# Altium PCB HAB-Communications-Board.PcbDoc (part 1 of 2)
Units mil, origin at the board's own origin, x right, y up, seen from the top; angles counter-clockwise.
Board outline 3937.01 x 3937.01 mil, 4 copper layers (Top Layer, Layer 1, Layer 2, Bottom Layer), stack 60.708 mil thick; 68 components, 59 nets, 326 pads, 208 vias.
Unrouted connection lines stored in the file: 48.
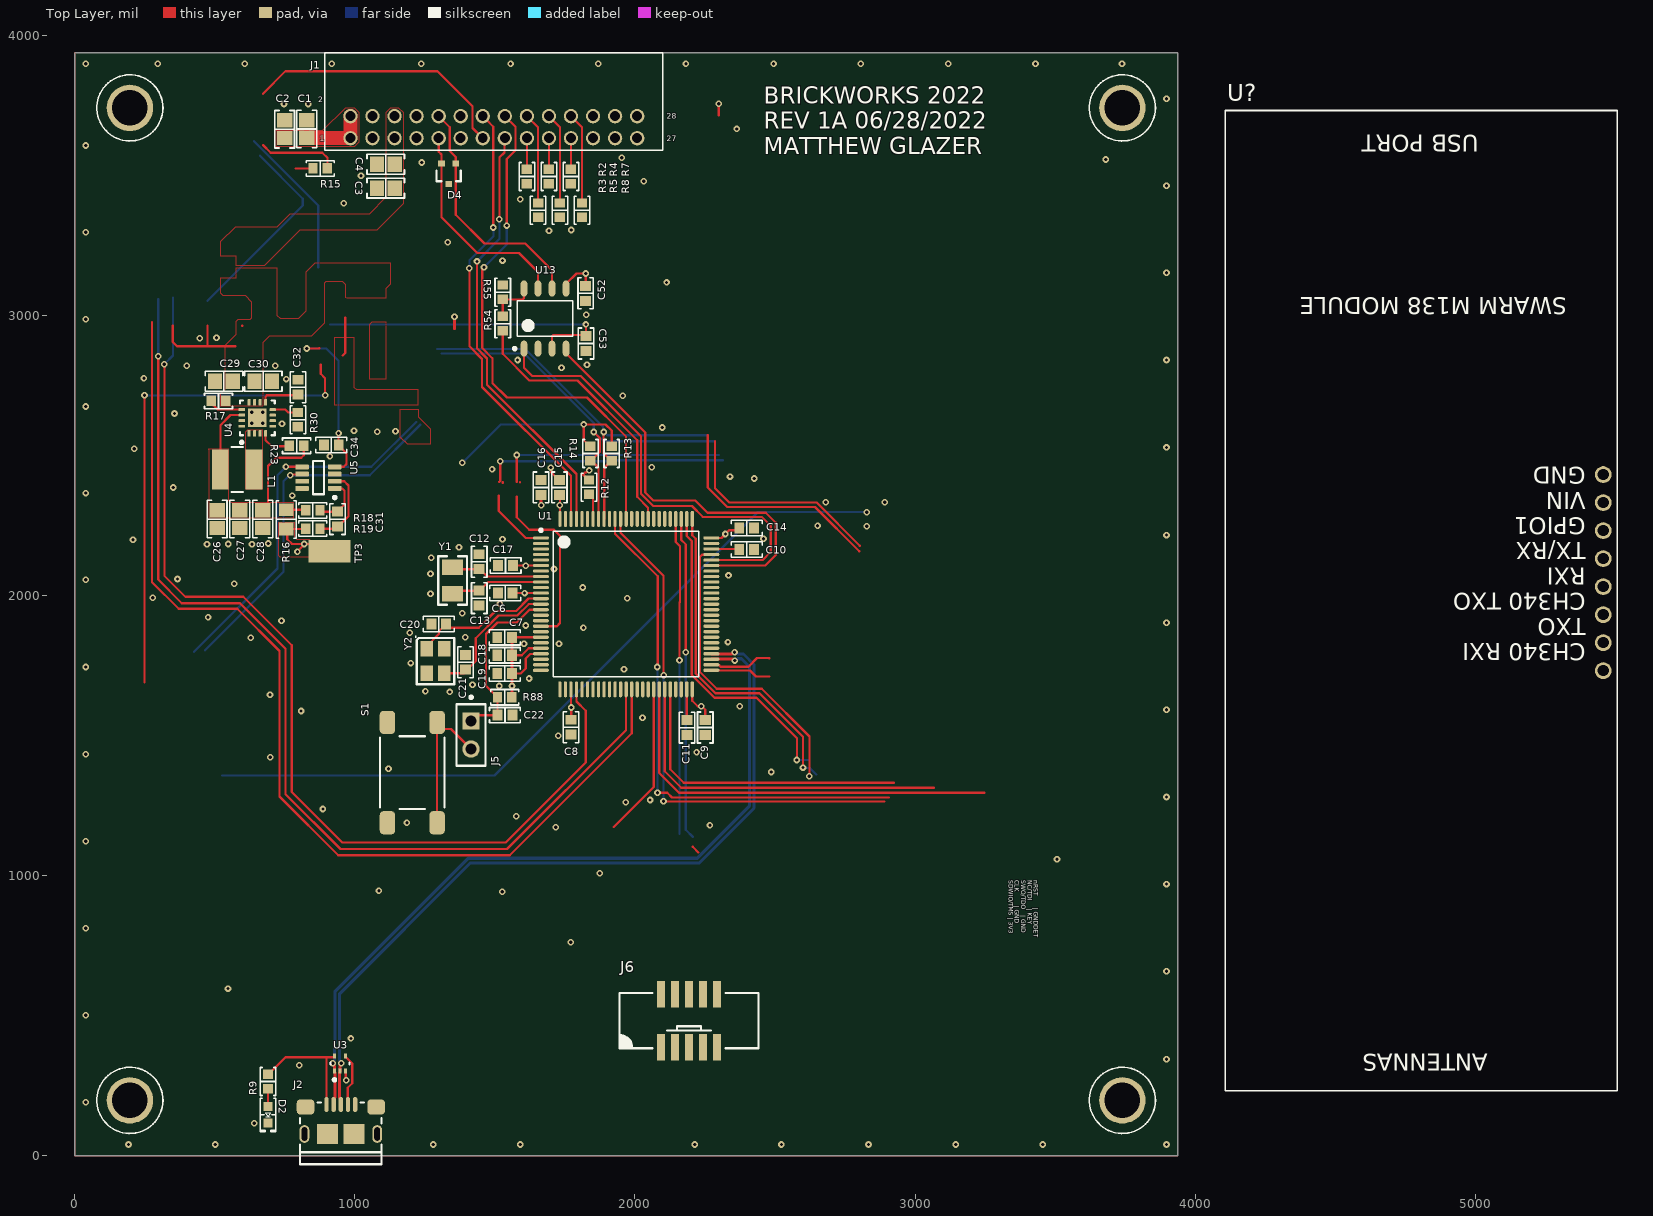
[diagram p0: Top Layer view]
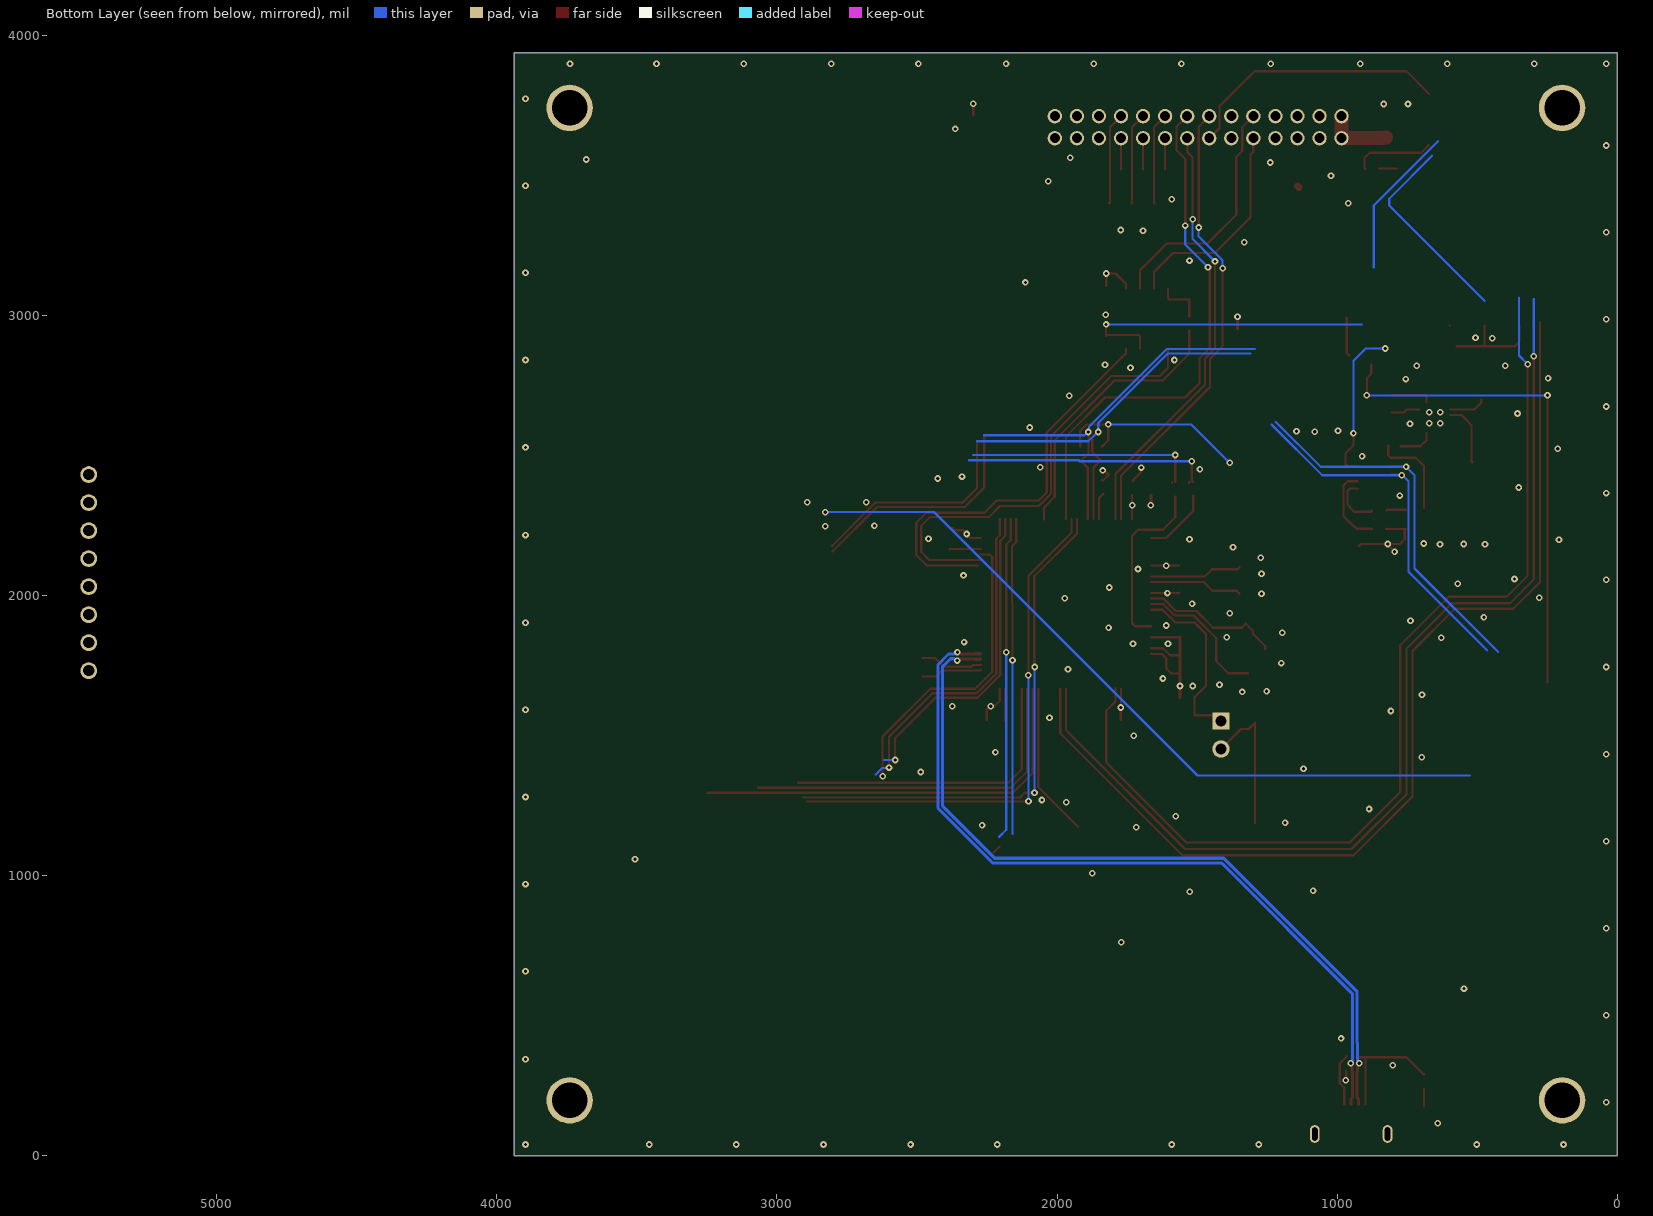
[diagram p1: Bottom Layer view, seen from below]
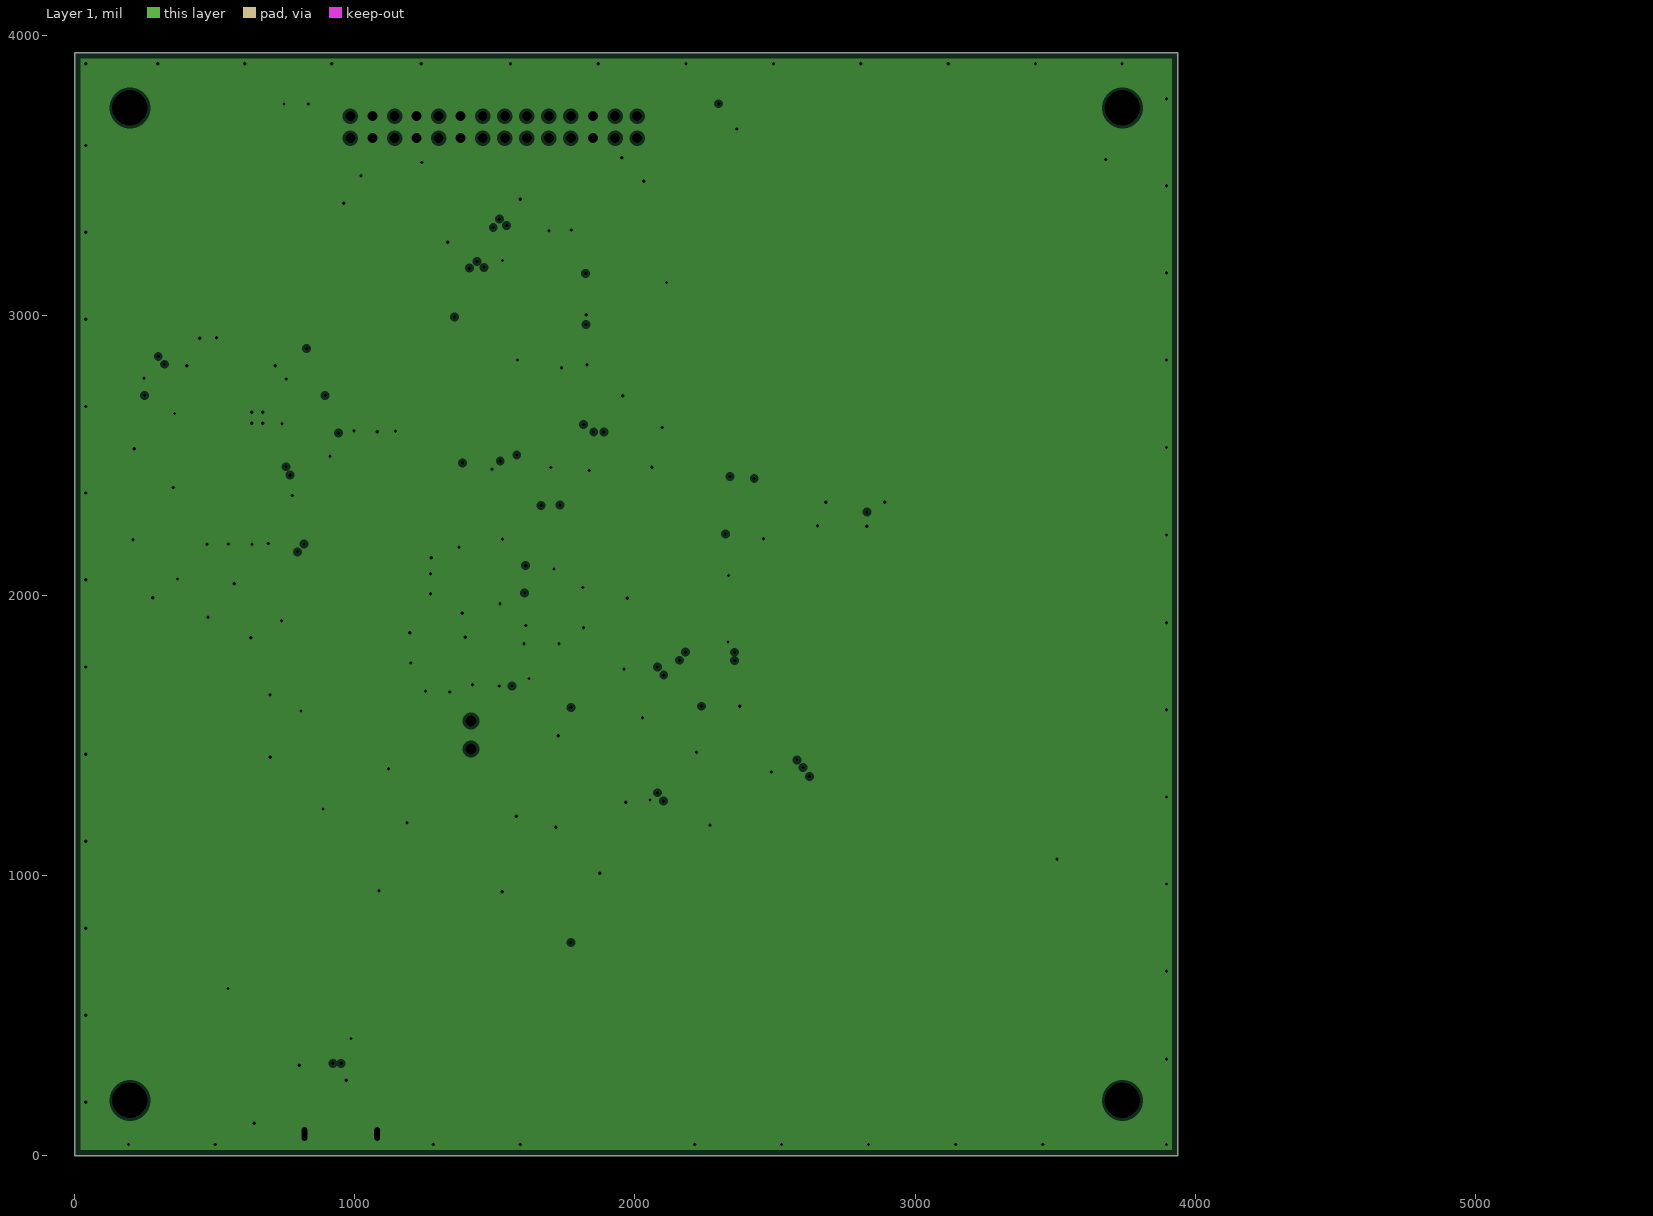
[diagram p2: Layer 1, clearances drawn from the general rule]
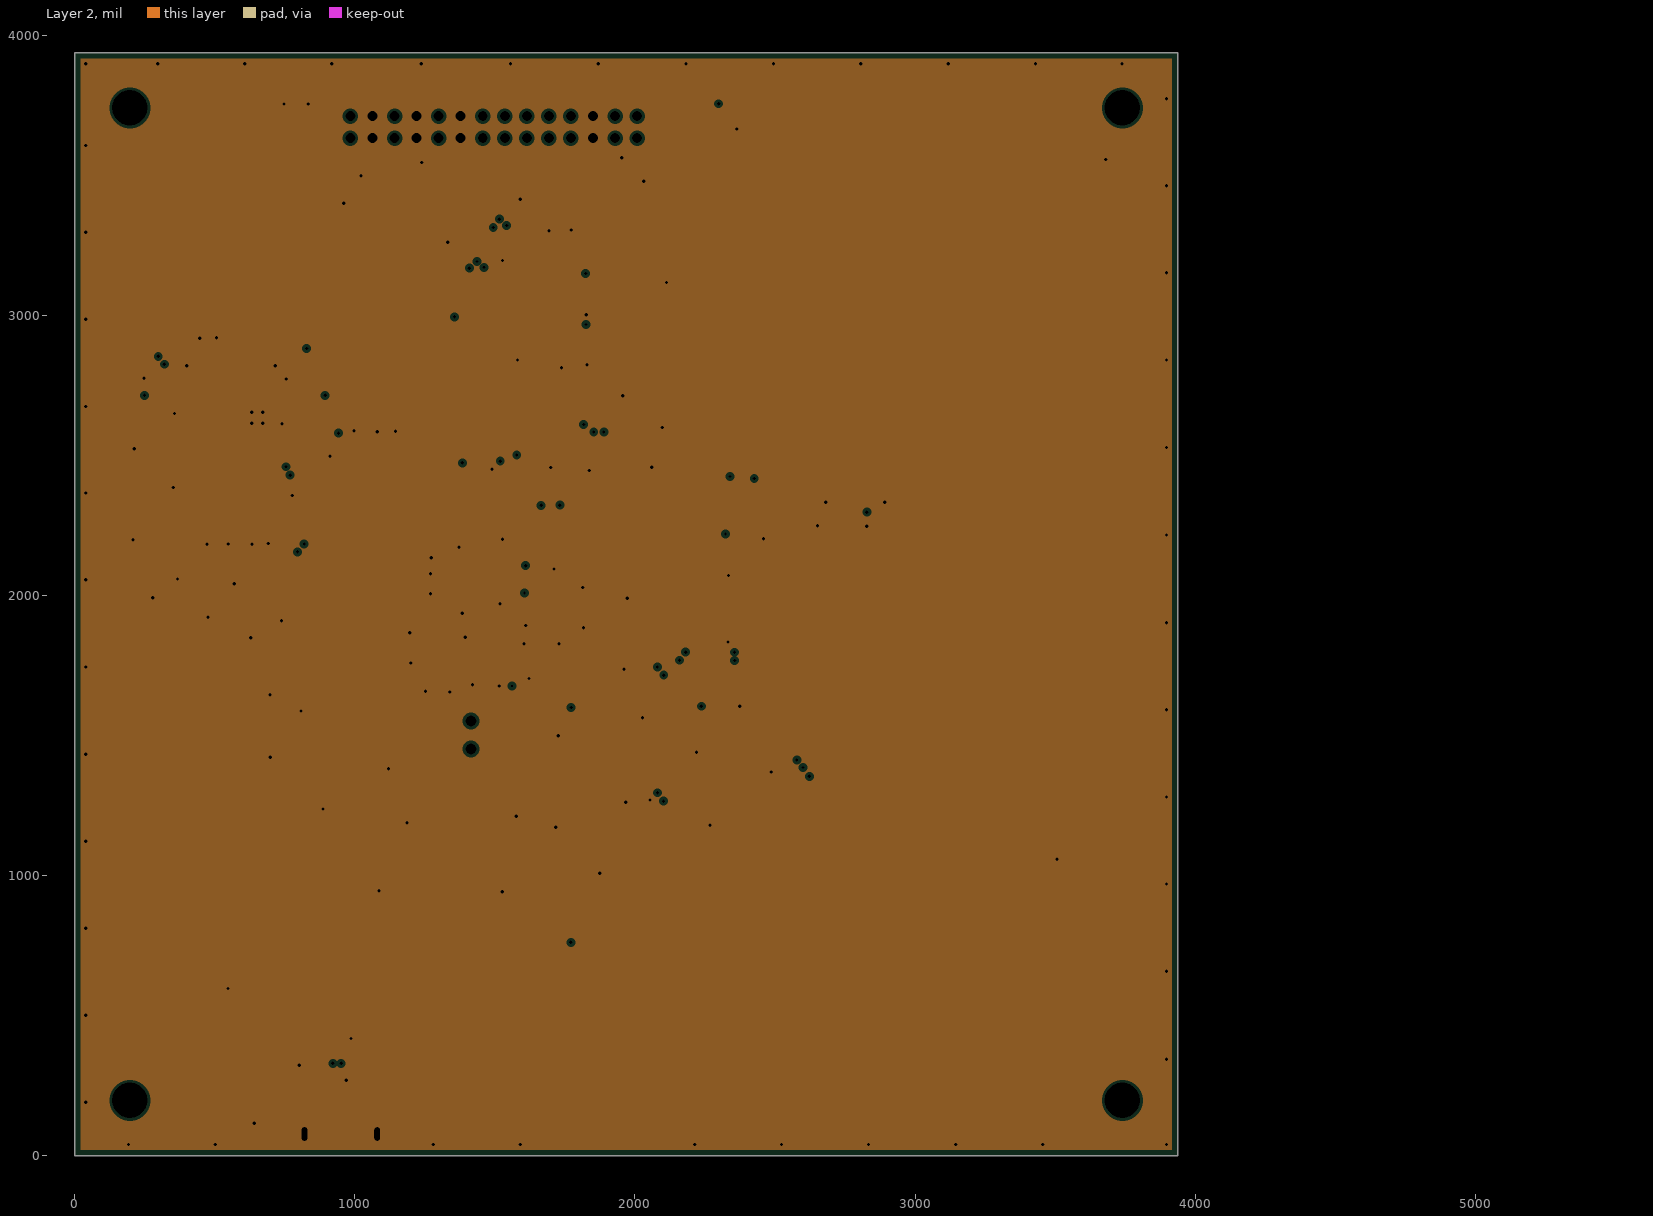
[diagram p3: Layer 2, clearances drawn from the general rule]
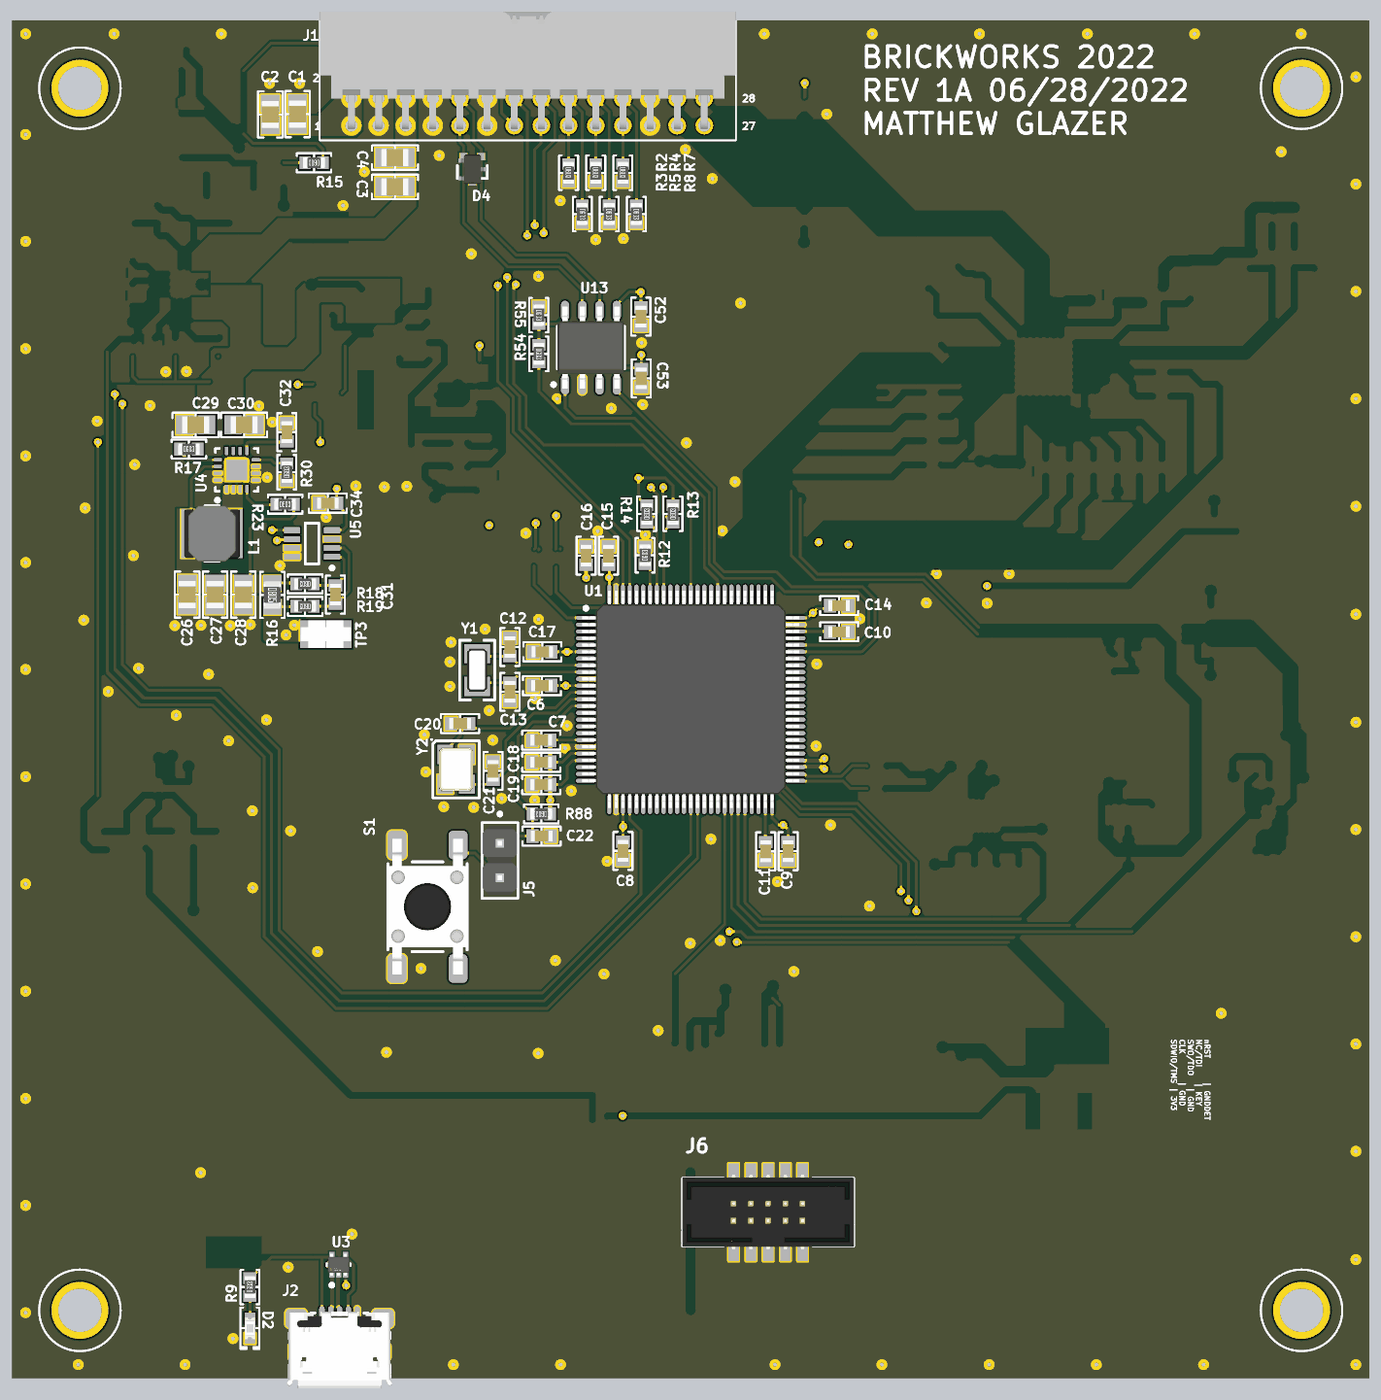
[diagram p4: 3D render of the assembled board from above, using the file's embedded part models]

## Layer stack, top to bottom
Top Solder: solder mask 0.394, SM-001, Dk 4
Top Layer: signal copper 1.614
Dielectric 2: prepreg 9.055, PP-018, Dk 4.3
Layer 1: plane copper 1.378, net GND
Dielectric 1: core 36.614, Core-028, Dk 4.3
Layer 2: plane copper 1.378, net (Multiple Nets)
Dielectric 3: prepreg 9.055, PP-018, Dk 4.3
Bottom Layer: signal copper 1.614
Bottom Solder: solder mask 0.394, SM-001, Dk 4

## Board outline
0,0 3937.01,0 3937.01,3937.01 0,3937.01

## Design rules (kind name [scope] priority, off if disabled: settings)
Clearance [All] p1: gap=6 ignorepadtopadclearanceinfootprint=TRUE
DiffPairsRouting DiffPairsRouting100 [InDifferentialPairClass('DIFF100')] p1: maxlimit=6 minlimit=6 mostfreqgap=6 toplayer_minwidth=8.18 toplayer_maxwidth=8.18 toplayer_prefwidth=8.18 bottomlayer_minwidth=8.18 bottomlayer_maxwidth=8.18 bottomlayer_prefwidth=8.18 impedanceprofiledriven=TRUE impedanceprofileid={3D3F9093-80F4-4E16-AB05-055419844720} impedanceprofilevalue=100.000000 maxuncoupledlength=500
DiffPairsRouting DiffPairsRouting90 [InDifferentialPairClass('DIFF90')] p2: maxlimit=6 minlimit=6 mostfreqgap=6 toplayer_minwidth=10.91 toplayer_maxwidth=10.91 toplayer_prefwidth=10.91 bottomlayer_minwidth=10.91 bottomlayer_maxwidth=10.91 bottomlayer_prefwidth=10.91 impedanceprofiledriven=TRUE impedanceprofileid={56CFB2EB-BAC8-47B2-B82B-7AF4E2608B64} impedanceprofilevalue=90.000000 maxuncoupledlength=500
HoleSize [All] p1: absolutevalues=TRUE maxlimit=150 minlimit=10 maxpercent=80.000 minpercent=20.000
HoleToHoleClearance [All] p1: gap=5 allowstackedmicrovias=TRUE
MinimumAnnularRing [All] p1: minimumring=5.91
MinimumSolderMaskSliver [All] p1: minsoldermaskwidth=1
PlaneClearance [All] p1: clearance=10
PlaneConnect [All] p1: planeconnectstyle=Direct reliefexpansion=20 reliefentries=4 reliefconductorwidth=10 reliefairgap=10
PolygonConnect PolygonConnect_7 [All] p1: connectstyle=Direct reliefconductorwidth=10 reliefentries=4 polygonreliefangle="90 Angle" airgapwidth=10
PolygonConnect PolygonConnect_6 [All] p2: connectstyle=Direct reliefconductorwidth=10 reliefentries=4 polygonreliefangle="90 Angle" airgapwidth=10
PolygonConnect PolygonConnect_5 [All vs IsNamedPolygon('Top Layer-+5')] p3: connectstyle=Direct reliefconductorwidth=10 reliefentries=4 polygonreliefangle="90 Angle" airgapwidth=10
PolygonConnect PolygonConnect_4 [All vs IsNamedPolygon('Top Layer-NetC62_2')] p4: connectstyle=Direct reliefconductorwidth=10 reliefentries=4 polygonreliefangle="90 Angle" airgapwidth=10
PolygonConnect PolygonConnect_3 [All vs IsNamedPolygon('Top Layer-NetC62_2')] p5: connectstyle=Relief reliefconductorwidth=10 reliefentries=4 polygonreliefangle="90 Angle" airgapwidth=10
PolygonConnect PolygonConnect_2 [All vs IsNamedPolygon('Top Layer-+5_Supply')] p6: connectstyle=Direct reliefconductorwidth=10 reliefentries=4 polygonreliefangle="90 Angle" airgapwidth=10
PolygonConnect PolygonConnect_1 [All vs IsNamedPolygon('Top Layer-GND') Or  IsNamedPolygon('Bot Layer- GND')] p7: connectstyle=Direct reliefconductorwidth=10 reliefentries=4 polygonreliefangle="90 Angle" airgapwidth=10
PolygonConnect [All] p8: connectstyle=Relief reliefconductorwidth=10 reliefentries=4 polygonreliefangle="90 Angle" airgapwidth=10
RoutingVias [All] p1: holewidth=20 width=35 viastyle="Through Hole" minholewidth=11.81 minwidth=21.65 maxholewidth=35 maxwidth=50
SilkToSilkClearance [All] p1: silktosilkclearance=5
SilkToSolderMaskClearance [IsPad] p1: minsilkscreentomaskgap=0.1 clearancetoexposedcopper=TRUE
SolderMaskExpansion [All] p1: expansion=4 istentingtop=FALSE
UnRoutedNet [All] p1: checkbadconnections=TRUE
Width Width_50ohm [InNet('RF_IN')] p1: maxlimit=15.96 minlimit=15.96 preferedwidth=15.96 impedanceprofiledriven=TRUE impedanceprofileid={C7A62132-7CFF-4661-B070-4CE1FDF975CA} impedanceprofilevalue=50.000000 minimp=50.000000 maximp=50.000000 favimp=50.000000
Width [All] p2: maxlimit=50 minlimit=6 preferedwidth=7.5
21 further rules are at their usual default settings.

## Classes and differential pairs
component class Transmitters: U?
differential pair class DIFF90: USB_HEADER
component class Transceivers: C52 C53 D4 R54 R55 U13
component class Power-Supplies: C26 C27 C28 C29 C30 C31 C32 C34 L1 R16 R17 R18 R19 R23 R30 TP3 U4 U5
component class Microcontroller: C6 C7 C8 C9 C10 C11 C12 C13 C14 C15 C16 C17 C18 C19 C20 C21 C22 J5 J6 R12 R13 R14 R88 S1 U1 Y1 Y2
component class Interfaces: C1 C2 C3 C4 D2 J1 J2 R2 R3 R4 R5 R7 R8 R9 R15 U3
differential pair USB_HEADER: +USB_HEADER_P -USB_HEADER_N

## Components (designator, comment, footprint, x,y, rotation, side; value= is the part's Value field where it differs from the comment)
C1 "10µF" "CAP 0805_2012" 828,3665 r270 top
C2 "10µF" "CAP 0805_2012" 749,3664 r270 top
C3 "10µF" "CAP 0805_2012" 1110.5,3454 r0 top
C4 "10µF" "CAP 0805_2012" 1110.5,3539 r0 top
C6 "0.1µF" "CAP 0603_1608" 1537,2008 r0 top
C7 "0.1µF" "CAP 0603_1608" 1535,1850 r0 top
C8 "0.1µF" "CAP 0603_1608" 1772,1529 r90 top
C9 "0.1µF" "CAP 0603_1608" 2251,1528 r90 top
C10 "2.2µF" "CAP 0603_1608" 2399,2164 r180 top
C11 "2.2µF" "CAP 0603_1608" 2186,1527.57 r90 top
C12 "2.1pF" "CAP 0603_1608" 1444,2120 r270 top
C13 "2.1pF" "CAP 0603_1608" 1444,1990 r90 top
C14 "0.1µF" "CAP 0603_1608" 2399,2240 r180 top
C15 "0.1µF" "CAP 0603_1608" 1730,2385 r270 top
C16 "4.7µF" "CAP 0603_1608" 1665,2385 r270 top
C17 "1µF" "CAP 0603_1608" 1538,2106 r0 top
C18 "0.1µF" "CAP 0603_1608" 1535,1786 r0 top
C19 "1µF" "CAP 0603_1608" 1535,1721 r0 top
C20 "24pF" "CAP 0603_1608" 1299.57,1898 r0 top
C21 "24pF" "CAP 0603_1608" 1395,1761 r270 top
C22 "0.1µF" "CAP 0603_1608" 1536,1572 r180 top
C26 "10µF" "CAP 0805_2012" 508,2272 r90 top
C27 "10µF" "CAP 0805_2012" 589,2272 r90 top
C28 "10µF" "CAP 0805_2012" 671,2272 r90 top
C29 "10µF" "CAP 0805_2012" 532.5,2764 r0 top
C30 "10µF" "CAP 0805_2012" 673,2764 r180 top
C31 "0.1µF" "CAP 0603_1608" 938,2272 r90 top
C32 "10000pF" "CAP 0603_1608" 797,2743 r270 top
C34 "0.1µF" "CAP 0603_1608" 916,2537 r0 top
C52 "0.1µF" "CAP 0603_1608" 1824,3078 r90 top
C53 "0.1µF" "CAP 0603_1608" 1825,2899 r90 top
D2 "Green" "LED 0603_1608 GREEN" 690,145 r270 top
D4 "PESD1CAN-UX" FP-SOT323-MFG 1335,3505 r270 top
J1 "0878332820" 0878332820 984.25,3710.63 r0 top
J2 "10118193-0001LF" "FCI USB 10118193-0001LF" 950,78.74 r180 top
J5 "M20-9990246" FP-M20-9990246-MFG 1415,1501 r270 top
J6 "3221-10-0300-00" "CNC TECH 3221-10-0300-00" 2193,481.49 r90 top
L1 "2.2µH" "BOURNS SRN4018" 580,2449 r180 top
R2 "10 kOhms" "RES 0603_1608" 1614.17,3495 r270 top
R3 "10 kOhms" "RES 0603_1608" 1654,3375 r270 top
R4 "10 kOhms" "RES 0603_1608" 1693,3495 r270 top
R5 "10 kOhms" "RES 0603_1608" 1732,3375 r270 top
R7 "10 kOhms" "RES 0603_1608" 1771.65,3495 r270 top
R8 "10 kOhms" "RES 0603_1608" 1811,3375 r270 top
R9 "590 Ohms" "RES 0603_1608" 690,264.41 r90 top
R12 "10 kOhms" "RES 0603_1608" 1836,2386 r90 top
R13 "4.7 kOhms" "RES 0603_1608" 1917,2506 r90 top
R14 "4.7 kOhms" "RES 0603_1608" 1841,2506 r90 top
R15 "0 Ohms" "RES 0603_1608" 876,3524 r180 top
R16 "240 mOhms" "RES 0805_2012" 755,2271 r270 top
R17 "10 kOhms" "RES 0603_1608" 513,2694 r0 top
R18 "10 Ohms" "RES 0603_1608" 850,2303 r180 top
R19 "10 Ohms" "RES 0603_1608" 850,2238 r180 top
R23 "100 kOhms" "RES 0603_1608" 792,2534 r0 top
R30 "10 kOhms" "RES 0603_1608" 797,2627 r90 top
R54 "100 Ohms" "RES 0603_1608" 1528,2970 r270 top
R55 "10 kOhms" "RES 0603_1608" 1528,3082 r270 top
R88 "10 kOhms" "RES 0603_1608" 1535,1636 r180 top
S1 "FSM6JSMAASTR" "TE FSM6JSMA" 1205,1367 r180 top
TP3 "5019" KSTN-5019_V 910,2157 r0 top
U1 "SCH - MICROCONTROLLER - STM32F407VET6TR" "PCB - LEADLESS - QFP - ST LQFP-100 14X14MM" 1968.5,1968.5 r0 top
U3 "TPD3E001DRLR" FP-DRL0005A-MFG 947,329 r0 top
U4 "TPS62152RGTT" RGT0016C_V 651.88,2633.45 r90 top
U5 "INA219AIDCNR" DCN0008A_M 870,2420 r180 top
U13 "SCH - INTERFACE - CAN - TI TCAN1051V" "PCB - LEADS - SOIC - TI SOIC-8" 1679,2988 r90 top
U? "SparkFun Swarm M138" SWARM_M138 5457,1731 r180 top
Y1 "32.768kHz" "ABRACON ABS07" 1349.04,2053.09 r270 top
Y2 "25MHz" "EPSON TSX-3225" 1287.84,1765.28 r270 top

## Footprints (in the part's own frame and the unit in brackets; to place one, negate y for a bottom-side part, rotate by r counter-clockwise, add the part's x,y. Pads: shape width x height; smd on the part's side, far side on the other; paste and mask are expansions set on the pad)
0878332820 [mm] "28 pin milli-grid header, right-angle"
  round 1.3 hole 0.9: 1(0,-2) 2(0,0) 3(2,-2) 4(2,0) 5(4,-2) 6(4,0) 7(6,-2) 8(6,0) 9(8,-2) 10(8,0) 11(10,-2) 12(10,0) 13(12,-2) 14(12,0) 15(14,-2) 16(14,0) 17(16,-2) 18(16,0) 19(18,-2) 20(18,0) 21(20,-2) 22(20,0) 23(22,-2) 24(22,0) 25(24,-2) 26(24,0) 27(26,-2) 28(26,0)
  silkscreen extent -2.32,-3.09 28.33,5.75, body extent -2.32,-2.25 28.33,6.4, height 6.35
"ABRACON ABS07" [mm] "Crystal, 2-Leads, Body 3.20x1.50mm, IPC Medium Density"
  rect 1.4x1.9 smd: 1(-1.2,0) 2(1.2,0)
  silkscreen extent -2.2,-1.3 2.2,1.3, body extent -1.62,-0.77 1.63,0.78, height 0.9
"BOURNS SRN4018" [mm] "Power Inductor, 2-Leads, Bourns, SRN4018-220M"
  rect 1.5x3.6 smd: 1(-1.525,0) 2(1.525,0)
  silkscreen extent -0.53,-2.05 0.53,2.05, body extent -2.05,-2.05 2.05,2.05, height 1.8
"CAP 0603_1608" [mm] "Chip Capacitor, 2-Leads, Body 1.60x0.80mm, IPC Medium Density"
  rect 0.9x1 smd: 1(-0.675,0) 2(0.675,0)
  silkscreen extent -1.4,-0.7 1.4,0.7, body extent -0.8,-0.41 0.8,0.41, height 0.82
"CAP 0805_2012" [mm] "Chip Capacitor, 2-Leads, Body 2.00x1.20mm, IPC Medium Density"
  rect 1.3x1.4 smd: 1(-0.8,0) 2(0.8,0)
  silkscreen extent -1.7,-0.9 1.7,0.9, body extent -1,-0.64 1,0.64, height 1.26
"CNC TECH 3221-10-0300-00" [mm]
  rect 2.4x0.76 smd: 1(-2.4,2.54) 2(-2.4,1.27) 3(-2.4,0) 4(-2.4,-1.27) 5(-2.4,-2.54) 6(2.4,-2.54) 7(2.4,-1.27) 8(2.4,0) 9(2.4,1.27) 10(2.4,2.54)
  silkscreen extent -2.5,-6.3 2.5,6.3, body extent -2.75,-6.32 2.75,6.33, height 5.6
DCN0008A_M [mm] "SOT23, 8-Leads, Body 3x1.75mm, Pitch 0.65mm, IPC Low Density"
  rrect22% 1.2x0.45 smd: 1(-1.475,0.975) 2(-1.475,0.325) 3(-1.475,-0.325) 4(-1.475,-0.975) 5(1.475,-0.975) 6(1.475,-0.325) 7(1.475,0.325) 8(1.475,0.975)
  silkscreen extent -1.6,-1.5 0.5,1.92, body extent -0.88,-1.5 0.87,1.5, height 1.45
"EPSON TSX-3225" [mm] "Crystal, 4-Leads, Body 2.50x3.20mm, Pitch 2.20mm, IPC Medium Density"
  rect 1.4x1.15 smd: 1(-1.1,-0.8) 2(1.1,-0.8) 3(1.1,0.8) 4(-1.1,0.8)
  silkscreen extent -2.25,-1.85 2.1,1.7, body extent -1.61,-1.26 1.61,1.26, height 0.6
"FCI USB 10118193-0001LF" [mm] "USB 2.0 Type B Micro"
  oval 0.4x1.35 smd: 1(1.3,-2.625) 2(0.65,-2.625) 3(0,-2.625) 4(-0.65,-2.625) 5(-1.3,-2.625)
  oval 0.9x1.6 hole 0.5 slot 1.2 at 90 deg: S(-3.3,0.05) S(3.3,0.05)
  rrect50% 1.6x1.4 smd: S(-3.2,-2.4) S(3.2,-2.4)
  rect 1.9x1.8 smd: S(-1.2,0.05) S(1.2,0.05)
  silkscreen extent -3.7,-2.8 3.7,2.8, body extent -3.93,-2.9 3.93,2.76, height 2.78
FP-DRL0005A-MFG [mm]
  rect 0.3x0.45 smd paste-1000 mask-1000: 1(-0.5,-0.675) 2(0,-0.675) 3(0.5,-0.675) 4(0.5,0.675) 5(-0.5,0.675)
  silkscreen extent -0.85,-1.62 0.85,0.08, body extent -1.1,-1.05 1.1,1.05, height 0.25
FP-M20-9990246-MFG [mm]
  rect 1.57x1.57 hole 1.02 paste-1000 mask+0: 1(-1.27,0)
  round 1.57 hole 1.02 paste-1000 mask+0: 2(1.27,0)
  silkscreen extent -3.55,-1.32 2.79,1.32, body extent -2.89,-1.42 2.89,1.42, height 0.25
FP-SOT323-MFG [mm]
  rect 0.55x0.6 smd paste-1000 mask+0: 1(-0.925,0.65) 2(-0.925,-0.65) 3(0.925,0)
  silkscreen extent -0.28,-1.1 0.67,1.1, body extent -1.33,-1.2 1.33,1.2, height 0.25
KSTN-5019_V [mm] "Test Point, 1-Leads, Body 3.81x2.03mm"
  rect 3.8x2.03 smd: 1(0,0)
  body extent -1.9,-1.01 1.9,1.02, height 2.29
"LED 0603_1608 GREEN" [mm] "Chip Diode, 2-Leads, Body 1.60x0.80mm, IPC Medium Density"
  rect 0.8x0.8 smd: 1(-0.75,0) 2(0.75,0)
  silkscreen extent -1.52,-0.7 1.52,0.7, body extent -0.8,-0.4 0.8,0.4, height 0.53
"PCB - LEADLESS - QFP - ST LQFP-100 14X14MM" [mm] "LQFP, 100-Leads, Body 14.00x14.00mm, Pitch 0.50mm, IPC Medium Density"
  oval 1.45x0.3 smd: 1(-7.725,6) 2(-7.725,5.5) 3(-7.725,5) 4(-7.725,4.5) 5(-7.725,4) 6(-7.725,3.5) 7(-7.725,3) 8(-7.725,2.5) 9(-7.725,2) 10(-7.725,1.5) 11(-7.725,1) 12(-7.725,0.5) 13(-7.725,0) 14(-7.725,-0.5) 15(-7.725,-1) 16(-7.725,-1.5) 17(-7.725,-2) 18(-7.725,-2.5) 19(-7.725,-3) 20(-7.725,-3.5) 21(-7.725,-4) 22(-7.725,-4.5) 23(-7.725,-5) 24(-7.725,-5.5) 25(-7.725,-6) 51(7.725,-6) 52(7.725,-5.5) 53(7.725,-5) 54(7.725,-4.5) 55(7.725,-4) 56(7.725,-3.5) 57(7.725,-3) 58(7.725,-2.5) 59(7.725,-2) 60(7.725,-1.5) 61(7.725,-1) 62(7.725,-0.5) 63(7.725,0) 64(7.725,0.5) 65(7.725,1) 66(7.725,1.5) 67(7.725,2) 68(7.725,2.5) 69(7.725,3) 70(7.725,3.5) 71(7.725,4) 72(7.725,4.5) 73(7.725,5) 74(7.725,5.5) 75(7.725,6)
  oval 0.3x1.45 smd: 26(-6,-7.725) 27(-5.5,-7.725) 28(-5,-7.725) 29(-4.5,-7.725) 30(-4,-7.725) 31(-3.5,-7.725) 32(-3,-7.725) 33(-2.5,-7.725) 34(-2,-7.725) 35(-1.5,-7.725) 36(-1,-7.725) 37(-0.5,-7.725) 38(0,-7.725) 39(0.5,-7.725) 40(1,-7.725) 41(1.5,-7.725) 42(2,-7.725) 43(2.5,-7.725) 44(3,-7.725) 45(3.5,-7.725) 46(4,-7.725) 47(4.5,-7.725) 48(5,-7.725) 49(5.5,-7.725) 50(6,-7.725) 76(6,7.725) 77(5.5,7.725) 78(5,7.725) 79(4.5,7.725) 80(4,7.725) 81(3.5,7.725) 82(3,7.725) 83(2.5,7.725) 84(2,7.725) 85(1.5,7.725) 86(1,7.725) 87(0.5,7.725) 88(0,7.725) 89(-0.5,7.725) 90(-1,7.725) 91(-1.5,7.725) 92(-2,7.725) 93(-2.5,7.725) 94(-3,7.725) 95(-3.5,7.725) 96(-4,7.725) 97(-4.5,7.725) 98(-5,7.725) 99(-5.5,7.725) 100(-6,7.725)
  silkscreen extent -7.85,-6.6 6.6,6.82, body extent -8,-8 8,8, height 1.58
"PCB - LEADS - SOIC - TI SOIC-8" [mm] "SOIC, 8-Leads, Body 4.91x3.90mm, Pitch 1.27mm, IPC Medium Density"
  oval 1.45x0.6 smd: 1(-2.725,1.905) 2(-2.725,0.635) 3(-2.725,-0.635) 4(-2.725,-1.905) 5(2.725,-1.905) 6(2.725,-0.635) 7(2.725,0.635) 8(2.725,1.905)
  silkscreen extent -2.85,-2.5 1.6,2.88, body extent -3.01,-2.45 3.01,2.45, height 1.63
"RES 0603_1608" [mm] "Chip Resistor, 2-Leads, Body 1.60x0.80mm, IPC Medium Density"
  rect 0.85x0.95 smd: 1(-0.65,0) 2(0.65,0)
  silkscreen extent -1.27,-0.7 1.27,0.7, body extent -0.8,-0.4 0.8,0.4, height 0.45
"RES 0805_2012" [mm] "Chip Resistor, 2-Leads, Body 2.00x1.25mm, IPC Medium Density"
  rect 1.15x1.35 smd: 1(-0.875,0) 2(0.875,0)
  silkscreen extent -1.7,-0.9 1.7,0.9, body extent -1,-0.62 1,0.63, height 0.6
RGT0016C_V [mm] "QFN, 16-Leads, Body 3x3mm, Pitch 0.5mm, Thermal Pad 1.65x1.65mm"
  rrect40% 0.6x0.25 smd: 1(-1.4,0.75) 2(-1.4,0.25) 3(-1.4,-0.25) 4(-1.4,-0.75) 9(1.4,-0.75) 10(1.4,-0.25) 11(1.4,0.25) 12(1.4,0.75)
  rrect40% 0.25x0.6 smd: 5(-0.75,-1.4) 6(-0.25,-1.4) 7(0.25,-1.4) 8(0.75,-1.4) 13(0.75,1.4) 14(0.25,1.4) 15(-0.25,1.4) 16(-0.75,1.4)
  rrect6% 1.55x1.55 on Top Paste: 17(0,0)
  rrect6% 1.7x1.7 smd paste-0.85: 17(0,0)
  silkscreen extent -2.35,-1.57 1.57,1.58, body extent -1.5,-1.5 1.5,1.5, height 1
SWARM_M138 [mil]
  round 60 hole 39.37: 1(0,0) 2(0,-100) 3(0,-200) 4(0,-300) 5(0,-400) 6(0,-500) 7(0,-600) 8(0,-700)
  round 60 hole 129.92 unplated: MH1(50,-1900) MH2(1250,-1900) MH3(1250,1400) MH4(50,1400)
  silkscreen extent -50,-2000 1350,1500
"TE FSM6JSMA" [mm]
  rrect50% 1.4x2.1 smd: 1(2.25,4.55) 2(2.25,-4.55) 3(-2.25,4.55) 4(-2.25,-4.55)
  silkscreen extent -2.92,-3.3 2.92,3.3, body extent -3,-5 3,5, height 7.11

## Part data
C1 C2 C3 C4 C26 C27 C28 C29 C30: library part CC0805KKX5R7BB106, "CAP CER 10UF 16V X5R 0805", Device Package="0805 (2012 Metric)", Manufacturer=Yageo, Operating Temperature="-55°C ~ 85°C", Supplier Part Number 1=311-1865-1-ND, Temperature Coefficient=X5R, Tolerance=±10%, Voltage - Rated=16V, Applications="General Purpose", Capacitance=10µF, ComponentLink1Description=Datasheet, ComponentLink1URL=https://www.yageo.com/upload/media/product/productsearch/datasheet/mlcc/UPY-GPHC_X5R_4V-to-50V_25.pdf, ComponentLink2Description="DigiKey Link", ComponentLink2URL=http://digikey.com/product-detail/en/yageo/CC0805KKX5R7BB106/311-1865-1-ND/5195767, LastUpdated="9/2/2020 1:04:30 AM", Lifecycle Status=Active, Minimum Order=1, Mounting Type="Surface Mount, MLCC", Package / Case="0805 (2012 Metric)", Packaging=TapeAndReel, PartId=8867, Part Number=CC0805KKX5R7BB106, Part Status=Active, Price=0.09, Series=CC, Size / Dimension="0.079\" L x 0.049\" W (2.00mm x 1.25mm)", Supplier 1=DigiKey, Thickness (Max)="0.057\" (1.45mm)"
C6 C7 C8 C9 C14 C15 C18 C22 C31 C34 C52 C53: library part CL10B104KA8WPNC, "CAP CER 0.1UF 25V X7R 0603", Device Package="0603 (1608 Metric)", Manufacturer="Samsung Electro-Mechanics", Operating Temperature="-55°C ~ 125°C", Ratings=AEC-Q200, Supplier Part Number 1=1276-6717-1-ND, Temperature Coefficient=X7R, Tolerance=±10%, Voltage - Rated=25V, Applications=Automotive, Capacitance=0.1µF, ComponentLink1Description=Datasheet, ComponentLink1URL=http://www.samsungsem.com/kr/support/product-search/mlcc/CL10B104KA8WPNC.jsp, ComponentLink2Description="DigiKey Link", ComponentLink2URL=http://digikey.com/product-detail/en/samsung-electro-mechanics/CL10B104KA8WPNC/1276-6717-1-ND/5961576, Features="Open Mode", LastUpdated="9/2/2020 1:03:30 AM", Lifecycle Status=Active, Minimum Order=1, Mounting Type="Surface Mount, MLCC", Package / Case="0603 (1608 Metric)", Packaging=TapeAndReel, PartId=5631, Part Number=CL10B104KA8WPNC, Part Status=Active, Price=0.02, Series=CL, Size / Dimension="0.063\" L x 0.031\" W (1.60mm x 0.80mm)", Supplier 1=DigiKey, Thickness (Max)="0.035\" (0.90mm)"
C10 C11: library part EMK107BJ225KA-T, "CAP CER 2.2UF 16V X5R 0603", Device Package="0603 (1608 Metric)", Manufacturer="Taiyo Yuden", Operating Temperature="-55°C ~ 85°C", Supplier Part Number 1=587-1430-1-ND, Temperature Coefficient=X5R, Tolerance=±10%, Voltage - Rated=16V, Applications="General Purpose", Capacitance=2.2µF, ComponentLink1Description=Datasheet, ComponentLink1URL="https://ds.yuden.co.jp/TYCOMPAS/ut/detail?pn=EMK107BJ225KA-T  &u=M", ComponentLink2Description="DigiKey Link", ComponentLink2URL=http://digikey.com/product-detail/en/taiyo-yuden/EMK107BJ225KA-T/587-1430-1-ND/1004061, LastUpdated="9/2/2020 1:03:30 AM", Lifecycle Status=Active, Minimum Order=1, Mounting Type="Surface Mount, MLCC", Package / Case="0603 (1608 Metric)", Packaging=TapeAndReel, PartId=5619, Part Number=EMK107BJ225KA-T, Part Status=Active, Price=0.02, Series=M, Size / Dimension="0.063\" L x 0.031\" W (1.60mm x 0.80mm)", Supplier 1=DigiKey, Thickness (Max)="0.035\" (0.90mm)"
C12 C13: library part CBR06C219B5GAC, "CAP CER RF 2.1PF 50V +/-0.1 PF C", Device Package="0603 (1608 Metric)", Manufacturer=KEMET, Operating Temperature="-55°C ~ 125°C", Supplier Part Number 1=399-16153-1-ND, Temperature Coefficient="C0G, NP0", Tolerance=±0.1pF, Voltage - Rated=50V, Applications="RF, Microwave, High Frequency", Capacitance=2.1pF, ComponentLink1Description=Datasheet, ComponentLink1URL=https://api.kemet.com/component-edge/download/datasheet/CBR06C219B5GAC.pdf, ComponentLink2Description="DigiKey Link", ComponentLink2URL=http://digikey.com/product-detail/en/kemet/CBR06C219B5GAC/399-16153-1-ND/7649738, Features="High Q, Low Loss, Ultra Low ESR", LastUpdated="9/2/2020 1:03:15 AM", Lifecycle Status=Active, Minimum Order=1, Mounting Type="Surface Mount, MLCC", Package / Case="0603 (1608 Metric)", Packaging=TapeAndReel, PartId=13663, Part Number=CBR06C219B5GAC, Part Status=Active, Price=0.05, Series="CBR-SMD RF C0G", Size / Dimension="0.063\" L x 0.031\" W (1.60mm x 0.80mm)", Supplier 1=DigiKey, Thickness (Max)="0.034\" (0.87mm)"
C16: library part C1608X5R1C475K080AC, "CAP CER 4.7UF 16V X5R 0603", Device Package="0603 (1608 Metric)", Manufacturer="TDK Corporation", Operating Temperature="-55°C ~ 85°C", Supplier Part Number 1=445-7478-1-ND, Temperature Coefficient=X5R, Tolerance=±10%, Voltage - Rated=16V, Applications="General Purpose", Capacitance=4.7µF, ComponentLink1Description=Datasheet, ComponentLink1URL=https://product.tdk.com/info/en/catalog/datasheets/mlcc_commercial_general_en.pdf?ref_disty=digikey, ComponentLink2Description="DigiKey Link", ComponentLink2URL=http://digikey.com/product-detail/en/tdk-corporation/C1608X5R1C475K080AC/445-7478-1-ND/2733550, Features="Low ESL", LastUpdated="9/2/2020 1:03:17 AM", Lifecycle Status=Active, Minimum Order=1, Mounting Type="Surface Mount, MLCC", Package / Case="0603 (1608 Metric)", Packaging=TapeAndReel, PartId=12901, Part Number=C1608X5R1C475K080AC, Part Status=Active, Price=0.06, Series=C, Size / Dimension="0.063\" L x 0.031\" W (1.60mm x 0.80mm)", Supplier 1=DigiKey, Thickness (Max)="0.035\" (0.90mm)"
C17 C19: library part GCM188R71C105KA64J, "CAP CER 1UF 16V X7R 0603", Device Package="0603 (1608 Metric)", Manufacturer="Murata Electronics", Operating Temperature="-55°C ~ 125°C", Ratings=AEC-Q200, Supplier Part Number 1=490-12657-1-ND, Temperature Coefficient=X7R, Tolerance=±10%, Voltage - Rated=16V, Applications=Automotive, Capacitance=1µF, ComponentLink1Description=Datasheet, ComponentLink1URL=https://www.murata.com/~/media/webrenewal/support/library/catalog/products/capacitor/mlcc/c03e.ashx?la=en-us, ComponentLink2Description="DigiKey Link", ComponentLink2URL=http://digikey.com/product-detail/en/murata-electronics/GCM188R71C105KA64J/490-12657-1-ND/5797626, LastUpdated="9/2/2020 1:03:14 AM", Lifecycle Status=Active, Minimum Order=1, Mounting Type="Surface Mount, MLCC", Package / Case="0603 (1608 Metric)", Packaging=TapeAndReel, PartId=13992, Part Number=GCM188R71C105KA64J, Part Status=Active, Price=0.03, Series=GCM, Size / Dimension="0.063\" L x 0.031\" W (1.60mm x 0.80mm)", Supplier 1=DigiKey, Thickness (Max)="0.035\" (0.90mm)"
C20 C21: library part CL10C240JB8NNNC, "CAP CER 24PF 50V C0G/NP0 0603", Device Package="0603 (1608 Metric)", Manufacturer="Samsung Electro-Mechanics", Operating Temperature="-55°C ~ 125°C", Supplier Part Number 1=1276-1761-1-ND, Temperature Coefficient="C0G, NP0", Tolerance=±5%, Voltage - Rated=50V, Applications="General Purpose", Capacitance=24pF, ComponentLink1Description=Datasheet, ComponentLink1URL=http://www.samsungsem.com/kr/support/product-search/mlcc/CL10C240JB8NNNC.jsp, ComponentLink2Description="DigiKey Link", ComponentLink2URL=http://digikey.com/product-detail/en/samsung-electro-mechanics/CL10C240JB8NNNC/1276-1761-1-ND/3889847, LastUpdated="9/2/2020 1:03:22 AM", Lifecycle Status=Active, Minimum Order=1, Mounting Type="Surface Mount, MLCC", Package / Case="0603 (1608 Metric)", Packaging=TapeAndReel, PartId=10003, Part Number=CL10C240JB8NNNC, Part Status=Active, Price=0.01, Series=CL, Size / Dimension="0.063\" L x 0.031\" W (1.60mm x 0.80mm)", Supplier 1=DigiKey, Thickness (Max)="0.035\" (0.90mm)"
C32: library part C0603S103K4RACTU, "CAP CER 10000PF 16V X7R 0603", Device Package="0603 (1608 Metric)", Manufacturer=KEMET, Operating Temperature="-55°C ~ 125°C", Supplier Part Number 1=399-9135-1-ND, Temperature Coefficient=X7R, Tolerance=±10%, Voltage - Rated=16V, Applications="Boardflex Sensitive", Capacitance=10000pF, ComponentLink1Description=Datasheet, ComponentLink1URL=https://api.kemet.com/component-edge/download/datasheet/C0603S103K4RACTU.pdf, ComponentLink2Description="DigiKey Link", ComponentLink2URL=http://digikey.com/product-detail/en/kemet/C0603S103K4RACTU/399-9135-1-ND/3522653, Features="Floating Electrode", LastUpdated="9/2/2020 1:03:34 AM", Lifecycle Status=Active, Minimum Order=1, Mounting Type="Surface Mount, MLCC", Package / Case="0603 (1608 Metric)", Packaging=TapeAndReel, PartId=3312, Part Number=C0603S103K4RACTU, Part Status=Active, Price=0.07, Series="SMD Comm X7R FE", Size / Dimension="0.063\" L x 0.031\" W (1.60mm x 0.80mm)", Supplier 1=DigiKey, Thickness (Max)="0.034\" (0.87mm)"
D2: library part LTST-C193KGKT-5A, "LED GREEN CLEAR CHIP SMD", Current - Test=5mA, Device Package="0603 (1608 Metric)", Lens Color=Colorless, Manufacturer="Lite-On Inc.", Millicandela Rating=16.25mcd, Supplier Device Package="Chip LED", Supplier Part Number 1=160-1828-1-ND, Voltage - Forward (Vf) (Typ)=2V, Color=Green, ComponentLink1Description=Datasheet, ComponentLink1URL=http://optoelectronics.liteon.com/upload/download/DS22-2007-0094/LTST-C193KGKT-5A.PDF, ComponentLink2Description="DigiKey Link", ComponentLink2URL=http://digikey.com/product-detail/en/lite-on-inc/LTST-C193KGKT-5A/160-1828-1-ND/2356247, Configuration=Standard, Height (Max)=0.45mm, LastUpdated="9/2/2020 1:20:41 AM", Lens Size="1.15mm x 0.80mm", Lens Style="Rectangle with Flat Top", Lens Transparency=Clear, Lifecycle Status=Active, Minimum Order=1, Mounting Type="Surface Mount", Package / Case="0603 (1608 Metric)", Packaging=TapeAndReel, PartId=694, Part Number=LTST-C193KGKT-5A, Part Status=Active, Price=0.06, Series=-, Size / Dimension="1.60mm L x 0.80mm W", Supplier 1=DigiKey, Viewing Angle=130°, Wavelength - Dominant=572nm, Wavelength - Peak=574nm
D4: library part CMP-14436-000006-1, "TVS DIODE 24V 50V SC70-3"
J1: Supplier Part Number 1=WM20552-ND, Supplier 1=Digi-Key
J2: "CONN RCPT USB2.0 MICRO B SMD R/A", Current Rating (Amps)="1.8A per Contact", Manufacturer="Amphenol ICC (FCI)", Operating Temperature="-30°C ~ 80°C", Supplier Part Number 1=609-4616-2-ND, Voltage - Rated=100VAC, ComponentLink1Description=Datasheet, ComponentLink1URL=https://cdn.amphenol-icc.com/media/wysiwyg/files/documentation/datasheet/inputoutput/io_usb_micro.pdf, ComponentLink2Description="DigiKey Link", ComponentLink2URL=//digikey.com/product-detail/en/amphenol-icc-fci/10118193-0001LF/609-4616-2-ND/2785388, Connector Type="USB - micro B", Features="Solder Retention", Gender=Receptacle, LastUpdated="12/9/2019 8:51:28 PM", Lifecycle Status=0, Mating Cycles=10000, Minimum Order=1, Mounting Feature=Horizontal, Mounting Type="Surface Mount, Right Angle; Through Hole", Number of Contacts=5, Number of Ports=1, Packaging=TapeAndReel, Part Number=10118193-0001LF, Part Status=Active, Price=0.21, Series=-, Shielding=Shielded, Specifications="USB 2.0", Supplier 1=DigiKey, Termination=Solder
J5: library part CMP-15831-000009-1, "CONN HEADER VERT 2POS 2.54MM", Current Rating=3A, Manufacturer=Harwin, Temperature="-40°C to +105°C", Temperature Range High=+105°C, Temperature Range Low=-40°C, Automotive=No, Category=Conn, ComponentLink2Description=Datasheet, ComponentLink2URL=https://cdn.harwin.com/pdfs/M20-999.pdf, Conn Gender=Male, Conn Orientation=Vertical, Contact Material=Tin,Nickel, Device Class L1=Connectors, Device Class L2="Headers and Wire Housings", Device Class L3=unset, Digikey Description="CONN HEADER VERT 2POS 2.54MM", Height=8.99mm, Lead Free=Yes, Manufacturer Part Number=M20-9990246, Mouser Description="2.54mm (0.1\") Pitch SIL Vertical PC Tail Pin Header, 6.1mm mating pin height, tin, 2 contacts", Number of Contacts=2, Number of Rows=1, Octopart=https://octopart.com/m20-9990246-harwin-2590635, Package=M20-9990246, Pitch=2.54mm, RoHS=TRUE
J6: "CONN HEADER SMD 10POS 1.27MM", Current Rating (Amps)=1A, Manufacturer="CNC Tech", Material Flammability Rating="UL94 V-0", Operating Temperature="-40°C ~ 105°C", Supplier Part Number 1=1175-1735-ND, ComponentLink1Description=Datasheet, ComponentLink1URL=http://cnctech.us/idcmatching2.pdf, ComponentLink2Description="DigiKey Link", ComponentLink2URL=http://digikey.com/product-detail/en/cnc-tech/3221-10-0300-00/1175-1735-ND/4878946, Connector Type=Header, Contact Finish - Mating=Gold, Contact Finish - Post=Gold, Contact Finish Thickness - Mating=Flash, Contact Material=Brass, Contact Shape=Square, Contact Type="Male Pin", Fastening Type=Push-Pull, Features="Keying Slot", Insulation Height="0.213\" (5.40mm)", Insulation Material="Polyamide (PA6T), Nylon 6T", LastUpdated="1/13/2020 12:09:21 AM", Lifecycle Status=Active, Minimum Order=1, Mounting Type="Surface Mount", Number of Positions=10, Number of Positions Loaded=All, Number of Rows=2, Packaging=Tray, PartId=109, Part Number=3221-10-0300-00, Part Status=Active, Pitch - Mating="0.050\" (1.27mm)", Price=0.73, Row Spacing - Mating="0.050\" (1.27mm)", Series=-, Shrouding="Shrouded - 4 Wall", Style="Board to Cable/Wire", Supplier 1=DigiKey, Termination=Solder
L1: library part SRN4018-2R2M, "FIXED IND 2.2UH 2.9A 44 MOHM SMD", Current - Saturation=3A, Current Rating (Amps)=2.9A, DC Resistance (DCR)="44mOhm Max", Device Package=Nonstandard, Frequency - Self Resonant=60MHz, Inductance Frequency - Test=100kHz, Manufacturer="Bourns Inc.", Operating Temperature="-40°C ~ 125°C", Q @ Freq="9 @ 7.96MHz", Supplier Part Number 1=SRN4018-2R2MCT-ND, Tolerance=±20%, ComponentLink1Description=Datasheet, ComponentLink1URL=https://www.bourns.com/docs/Product-Datasheets/SRN4018.pdf, ComponentLink2Description="DigiKey Link", ComponentLink2URL=http://digikey.com/product-detail/en/bourns-inc/SRN4018-2R2M/SRN4018-2R2MCT-ND/3821517, Height - Seated (Max)="0.071\" (1.80mm)", Inductance=2.2µH, LastUpdated="9/2/2020 1:30:23 AM", Lifecycle Status=Active, Material - Core=Ferrite, Minimum Order=1, Mounting Type="Surface Mount", Package / Case=Nonstandard, Packaging=TapeAndReel, PartId=3660, Part Number=SRN4018-2R2M, Part Status=Active, Price=0.16, Series=SRN4018, Shielding=Semi-Shielded, Size / Dimension="0.157\" L x 0.157\" W (4.00mm x 4.00mm)", Supplier 1=DigiKey, Type=Wirewound
R2 R3 R4 R5 R7 R8 R12 R17 R30 R55 R88: library part RMCF0603JT10K0, "RES 10K OHM 5% 1/10W 0603", Device Package="0603 (1608 Metric)", Manufacturer="Stackpole Electronics Inc", Operating Temperature="-55°C ~ 155°C", Power (Watts)="0.1W, 1/10W", Ratings=AEC-Q200, Supplier Device Package=0603, Supplier Part Number 1=RMCF0603JT10K0CT-ND, Temperature Coefficient=±200ppm/°C, Tolerance=±5%, ComponentLink1Description=Datasheet, ComponentLink1URL=https://www.seielect.com/catalog/sei-packaging.pdf, ComponentLink2Description="DigiKey Link", ComponentLink2URL=http://digikey.com/product-detail/en/stackpole-electronics-inc/RMCF0603JT10K0/RMCF0603JT10K0CT-ND/1943191, Composition="Thick Film", Features="Automotive AEC-Q200", Height - Seated (Max)="0.022\" (0.55mm)", LastUpdated="8/30/2020 8:48:45 PM", Lifecycle Status=Active, Minimum Order=1, Number of Terminations=2, Package / Case="0603 (1608 Metric)", Packaging=CutTape, PartId=25659, Part Number=RMCF0603JT10K0, Part Status=Active, Price=0.10, Resistance="10 kOhms", Series=RMCF, Size / Dimension="0.061\" L x 0.031\" W (1.55mm x 0.80mm)", Supplier 1=DigiKey
R9: library part RMCF0603FT590R, "RES 590 OHM 1% 1/10W 0603", Device Package="0603 (1608 Metric)", Manufacturer="Stackpole Electronics Inc", Operating Temperature="-55°C ~ 155°C", Power (Watts)="0.1W, 1/10W", Ratings=AEC-Q200, Supplier Device Package=0603, Supplier Part Number 1=RMCF0603FT590RCT-ND, Temperature Coefficient=±100ppm/°C, Tolerance=±1%, ComponentLink1Description=Datasheet, ComponentLink1URL=https://www.seielect.com/catalog/sei-rmcf_rmcp.pdf, ComponentLink2Description="DigiKey Link", ComponentLink2URL=http://digikey.com/product-detail/en/stackpole-electronics-inc/RMCF0603FT590R/RMCF0603FT590RCT-ND/2418096, Composition="Thick Film", Features="Automotive AEC-Q200", Height - Seated (Max)="0.022\" (0.55mm)", LastUpdated="9/2/2020 1:09:40 AM", Lifecycle Status=Active, Minimum Order=1, Number of Terminations=2, Package / Case="0603 (1608 Metric)", Packaging=CutTape, PartId=23847, Part Number=RMCF0603FT590R, Part Status=Active, Price=0.10, Resistance="590 Ohms", Series=RMCF, Size / Dimension="0.061\" L x 0.031\" W (1.55mm x 0.80mm)", Supplier 1=DigiKey
R13 R14: library part RMCF0603FT4K70, "RES 4.7K OHM 1% 1/10W 0603", Device Package="0603 (1608 Metric)", Manufacturer="Stackpole Electronics Inc", Operating Temperature="-55°C ~ 155°C", Power (Watts)="0.1W, 1/10W", Ratings=AEC-Q200, Supplier Device Package=0603, Supplier Part Number 1=RMCF0603FT4K70CT-ND, Temperature Coefficient=±100ppm/°C, Tolerance=±1%, ComponentLink1Description=Datasheet, ComponentLink1URL=https://www.seielect.com/catalog/sei-rmcf_rmcp.pdf, ComponentLink2Description="DigiKey Link", ComponentLink2URL=http://digikey.com/product-detail/en/stackpole-electronics-inc/RMCF0603FT4K70/RMCF0603FT4K70CT-ND/1943033, Composition="Thick Film", Features="Automotive AEC-Q200", Height - Seated (Max)="0.022\" (0.55mm)", LastUpdated="9/2/2020 1:10:22 AM", Lifecycle Status=Active, Minimum Order=1, Number of Terminations=2, Package / Case="0603 (1608 Metric)", Packaging=CutTape, PartId=6078, Part Number=RMCF0603FT4K70, Part Status=Active, Price=0.10, Resistance="4.7 kOhms", Series=RMCF, Size / Dimension="0.061\" L x 0.031\" W (1.55mm x 0.80mm)", Supplier 1=DigiKey
R15: library part RMCF0603ZT0R00, "RES 0 OHM JUMPER 1/10W 0603", Device Package="0603 (1608 Metric)", Manufacturer="Stackpole Electronics Inc", Operating Temperature="-55°C ~ 155°C", Power (Watts)="0.1W, 1/10W", Ratings=AEC-Q200, Supplier Device Package=0603, Supplier Part Number 1=RMCF0603ZT0R00CT-ND, Tolerance=Jumper, ComponentLink1Description=Datasheet, ComponentLink1URL=https://www.seielect.com/catalog/sei-rmcf_rmcp.pdf, ComponentLink2Description="DigiKey Link", ComponentLink2URL=http://digikey.com/product-detail/en/stackpole-electronics-inc/RMCF0603ZT0R00/RMCF0603ZT0R00CT-ND/1943218, Composition="Thick Film", Features="Automotive AEC-Q200", Height - Seated (Max)="0.022\" (0.55mm)", LastUpdated="9/2/2020 1:09:45 AM", Lifecycle Status=Active, Minimum Order=1, Number of Terminations=2, Package / Case="0603 (1608 Metric)", Packaging=CutTape, PartId=22613, Part Number=RMCF0603ZT0R00, Part Status=Active, Price=0.10, Resistance="0 Ohms", Series=RMCF, Size / Dimension="0.061\" L x 0.031\" W (1.55mm x 0.80mm)", Supplier 1=DigiKey
R16: library part ERJ-6DQFR24V, "RES 0.24 OHM 1% 1/2W 0805", Device Package="0805 (2012 Metric)", Manufacturer="Panasonic Electronic Components", Operating Temperature="-55°C ~ 155°C", Power (Watts)="0.5W, 1/2W", Ratings=AEC-Q200, Supplier Device Package=0805, Supplier Part Number 1=P19293CT-ND, Temperature Coefficient=±100ppm/°C, Tolerance=±1%, ComponentLink1Description=Datasheet, ComponentLink1URL=https://industrial.panasonic.com/cdbs/www-data/pdf/RDN0000/AOA0000C313.pdf, ComponentLink2Description="DigiKey Link", ComponentLink2URL=http://digikey.com/product-detail/en/panasonic-electronic-components/ERJ-6DQFR24V/P19293CT-ND/6004648, Composition="Thick Film", Features="Automotive AEC-Q200, Current Sense", Height - Seated (Max)="0.028\" (0.70mm)", LastUpdated="9/2/2020 1:14:59 AM", Lifecycle Status=Active, Minimum Order=1, Number of Terminations=2, Package / Case="0805 (2012 Metric)", Packaging=TapeAndReel, PartId=39224, Part Number=ERJ-6DQFR24V, Part Status=Active, Price=0.04, Resistance="240 mOhms", Series=ERJ, Size / Dimension="0.079\" L x 0.049\" W (2.00mm x 1.25mm)", Supplier 1=DigiKey
R18 R19: library part CRGCQ0603F10R, "CRGCQ 0603 10R 1%", Device Package="0603 (1608 Metric)", Manufacturer="TE Connectivity Passive Product", Operating Temperature="-55°C ~ 155°C", Power (Watts)="0.1W, 1/10W", Ratings=AEC-Q200, Supplier Device Package=0603, Supplier Part Number 1=A129664CT-ND, Temperature Coefficient=±400ppm/°C, Tolerance=±1%, ComponentLink1Description=Datasheet, ComponentLink1URL=https://www.te.com/commerce/DocumentDelivery/DDEController?Action=srchrtrv&DocNm=1773204-3&DocType=DS&DocLang=English, ComponentLink2Description="DigiKey Link", ComponentLink2URL=http://digikey.com/product-detail/en/te-connectivity-passive-product/CRGCQ0603F10R/A129664CT-ND/8577496, Composition="Thick Film", Features="Automotive AEC-Q200, Moisture Resistant", Height - Seated (Max)="0.022\" (0.55mm)", LastUpdated="9/2/2020 1:09:39 AM", Lifecycle Status=Active, Minimum Order=1, Number of Terminations=2, Package / Case="0603 (1608 Metric)", Packaging=CutTape, PartId=23975, Part Number=CRGCQ0603F10R, Part Status=Active, Price=0.10, Resistance="10 Ohms", Series=CRGCQ, Size / Dimension="0.063\" L x 0.031\" W (1.60mm x 0.80mm)", Supplier 1=DigiKey
R23: library part RC0603JR-10100KL, "RES SMD 100K OHM 5% 1/10W 0603", Device Package="0603 (1608 Metric)", Manufacturer=Yageo, Operating Temperature="-55°C ~ 155°C", Power (Watts)="0.1W, 1/10W", Supplier Device Package=0603, Supplier Part Number 1=YAG2294CT-ND, Temperature Coefficient=±100ppm/°C, Tolerance=±5%, ComponentLink1Description=Datasheet, ComponentLink1URL=https://www.yageo.com/upload/media/product/productsearch/datasheet/rchip/PYu-RC_Group_51_RoHS_L_10.pdf, ComponentLink2Description="DigiKey Link", ComponentLink2URL=http://digikey.com/product-detail/en/yageo/RC0603JR-10100KL/YAG2294CT-ND/5252408, Composition="Thick Film", Features="Moisture Resistant", Height - Seated (Max)="0.022\" (0.55mm)", LastUpdated="9/2/2020 1:10:22 AM", Lifecycle Status=Active, Minimum Order=1, Number of Terminations=2, Package / Case="0603 (1608 Metric)", Packaging=CutTape, PartId=6071, Part Number=RC0603JR-10100KL, Part Status=Active, Price=0.10, Resistance="100 kOhms", Series=RC, Size / Dimension="0.063\" L x 0.031\" W (1.60mm x 0.80mm)", Supplier 1=DigiKey
R54: library part RMCF0603FG100R, "RES 100 OHM 1% 1/10W 0603", Device Package="0603 (1608 Metric)", Manufacturer="Stackpole Electronics Inc", Operating Temperature="-55°C ~ 155°C", Power (Watts)="0.1W, 1/10W", Ratings=AEC-Q200, Supplier Device Package=0603, Supplier Part Number 1=RMCF0603FG100RCT-ND, Temperature Coefficient=±100ppm/°C, Tolerance=±1%, ComponentLink1Description=Datasheet, ComponentLink1URL=https://www.seielect.com/catalog/sei-rmcf_rmcp.pdf, ComponentLink2Description="DigiKey Link", ComponentLink2URL=http://digikey.com/product-detail/en/stackpole-electronics-inc/RMCF0603FG100R/RMCF0603FG100RCT-ND/4425033, Composition="Thick Film", Features="Automotive AEC-Q200", Height - Seated (Max)="0.022\" (0.55mm)", LastUpdated="9/2/2020 1:09:39 AM", Lifecycle Status=Active, Minimum Order=1, Number of Terminations=2, Package / Case="0603 (1608 Metric)", Packaging=CutTape, PartId=24036, Part Number=RMCF0603FG100R, Part Status=Active, Price=0.10, Resistance="100 Ohms", Series=RMCF, Size / Dimension="0.061\" L x 0.031\" W (1.55mm x 0.80mm)", Supplier 1=DigiKey
S1: "SWITCH TACTILE SPST-NO 0.05A 24V", Contact Rating @ Voltage="0.05A @ 24VDC", Manufacturer="TE Connectivity ALCOSWITCH Switches", Operating Force=260gf, Operating Temperature="-40°C ~ 105°C", Supplier Part Number 1=450-2138-1-ND, Actuator Height off PCB, Vertical=7.00mm, Actuator Orientation="Top Actuated", Actuator Type=Standard, Circuit=SPST-NO, ComponentLink1Description=Datasheet, ComponentLink1URL=https://www.te.com/commerce/DocumentDelivery/DDEController?Action=srchrtrv&DocNm=1308111-1_SWITCHES_CORE_PROGRAM_CATALOG&DocType=CS&DocLang=English, ComponentLink2Description="DigiKey Link", ComponentLink2URL=http://digikey.com/product-detail/en/te-connectivity-alcoswitch-switches/FSM6JSMAASTR/450-2138-1-ND/5343818, Illumination=Non-Illuminated, LastUpdated="9/2/2020 1:27:08 AM", Lifecycle Status=Active, Minimum Order=1, Mounting Type="Surface Mount", Outline="6.00mm x 6.00mm", Packaging=TapeAndReel, Part Number=FSM6JSMAASTR, Part Status=Active, Price=0.37, Series=FSMJSMA, Supplier 1=DigiKey, Switch Function=Off-Mom, Termination Style="Gull Wing"
TP3: library part CMP-1672-00008-1, "Test Point, 1 Position SMD, RoHS, Tape and Reel", Package Quantity=1000, ComponentLink1Description="Manufacturer URL", ComponentLink1URL=http://www.keyelco.com/, ComponentLink2Description=Datasheet, ComponentLink2URL=http://www.keyelco.com/product-pdf.cfm?p=1357, Contact Plating=Silver, DatasheetVersion=03/2014, Mount="Surface Mount", Mounting Technology="Surface Mount", PackageDescription="1-Pin Surface Mount Device, Body 3.81 x 2.03 mm", PackageReference=5019, Packaging="Tape and Reel", Pins=1, RoHSCompliant=True
U1: Supplier Part Number 1=497-19657-1-ND, Supplier 1=Digi-Key
U3: library part CMP-0326-00052-4, "TVS DIODE 5.5V SOT5", Breakdown Voltage=11V, Capacitance=1.5pF, Case/Package=SOT-553, Clamping Voltage=105.5V, Leakage Current=1nA, Max Operating Temperature=85°C, Max Supply Current=100nA, Max Supply Voltage=5.5V, Min Operating Temperature=-40°C, Min Supply Voltage=900mV, Package Quantity=1, Peak Pulse Power=90W, Power Line Protection=Yes, Depth=1.2mm, Direction=Unidirectional, Height=0.55mm, Interface=USB, Lead Free="Lead Free", Length=1.6mm, Max Supply Voltage (DC)=5.5V, Min Breakdown Voltage=11V, Min Supply Voltage (DC)=900mV, Nominal Supply Current=1nA, Number of Bidirectional Channels=3, Number of Channels=3, Number of Pins=5, Packaging="Tape and Reel", Radiation Hardening=No, REACH SVHC="No SVHC", Reverse Standoff Voltage=5.5V, RoHS Compliant=Yes, Termination=SMD/SMT, Weight=9.9E-05oz, Width=1.2mm
U4: library part CMP-0323-00129-3, "Buck Step Down Regulator with 3 to 17 V Input and 3.3 V Output, -40 to 85 degC, 16-Pin QFN (RGT), Green (RoHS & no Sb/Br)", Manufacturer="Texas Instruments", Rating=Catalog, Switch Current Limit(Typ)(A)=1.7, Code_JEDEC=MO-220, ComponentLink1Description=Datasheet, ComponentLink1URL=http://www.ti.com/general/docs/lit/getliterature.tsp?genericPartNumber=TPS62152&fileType=pdf, ComponentLink2Description="Package Specification", ComponentLink2URL=http://www.ti.com/litv/pdf/mpqf119g, ComponentLink3Description="URL Link1", ComponentLink3URL="Samples URL:http://www.ti.com/product/tps54611#samples", DatasheetVersion=SLVSAL5, Duty Cycle(Max)(%)=100, Eco-Plan="Green (RoHS & no Sb/Br)", Iout(Max)(A)=1, Iq(Typ)(mA)=0.017, Mounting Technology="Surface Mount", PackageDescription="16-Pin Plastic Quad Flat No-Lead, 3 x 3 mm Body, 0.5 mm Pitch, 1.7 x 1.7 mm Exposed Pad", PackageReference=RGT0016C, PackageVersion="revH, Oct-2011", PartNumber=TPS62152RGTT, Preset Vout(V)=3.3, Regulated Outputs(#)=1, SubFamily="Step-Down Regulator", Synchronous Rectification=TRUE, Topology=Buck, Vin(Max)(V)=17, Vin(Min)(V)=3, Vout(Max)(V)=3.3, Vout(Min)(V)=3.3
U5: library part CMP-0704-00041-2, "Zero-Drift, Bi-directional Current / Power Monitor, 3 to 5.5 V, -40 to 125 degC, 8-pin SOP (DCN8), Green (RoHS & no Sb/Br)", Manufacturer="Texas Instruments", Quiescent Current (+/-)(Typ)(mA)=0.7, Rating=Catalog, CMRR(Min)(dB)=100, Code_JEDEC=MO-178, Common Mode Range(Max)(V)=26, Common Mode Range(Min)(V)=0, ComponentLink1Description="Manufacturer URL", ComponentLink1URL=http://www.ti.com/, ComponentLink2Description=Datasheet, ComponentLink2URL=http://www.ti.com/general/docs/lit/getliterature.tsp?genericPartNumber=INA219&fileType=pdf, ComponentLink3Description="Package Specification", ComponentLink3URL=http://www.ti.com/lit/ml/mpds099c/mpds099c.pdf, DatasheetVersion=SBOS448F, Eco-Plan="Green (RoHS & no Sb/Br)", Gain(V/V)="1, 0.5, 0.25, 0.125", Input Offset (+/-)(Max)(uV)=100, Mounting Technology="Surface Mount", PackageDescription="8-Pin Plastic Small Outline, Body 1.6 x 2.9 mm, Pitch 0.65 mm", PackageReference=DCN0008A, PackageVersion="4202106/D, 11/2009", PartNumber=INA219AIDCNR, Small-Signal Bandwidth(Typ)(MHz)=0.011, SubFamily="Current Shunt Monitor", Vs(Max)(V)=5.5, Vs(Min)(V)=3
U13: Supplier Part Number 1=296-44228-1-ND, Supplier 1=Digi-Key
Y1: library part ABS07-166-32.768KHZ-T, "IOT 32.786KHZ XTAL", ESR (Equivalent Series Resistance)="70 kOhms", Frequency Tolerance=±10ppm, Load Capacitance=7pF, Manufacturer="Abracon LLC", Operating Mode=Fundamental, Operating Temperature="-40°C ~ 85°C", Package / Case="2-SMD, No Lead", Supplier Part Number 1=535-14514-1-ND, ComponentLink1Description=Datasheet, ComponentLink1URL=https://abracon.com/datasheets/ABS07-166-32.768kHz-T.pdf, ComponentLink2Description="DigiKey Link", ComponentLink2URL=http://digikey.com/product-detail/en/abracon-llc/ABS07-166-32.768KHZ-T/535-14514-1-ND/8827205, Frequency=32.768kHz, Height - Seated (Max)="0.035\" (0.90mm)", LastUpdated="9/2/2020 1:21:47 AM", Lifecycle Status=Active, Minimum Order=1, Mounting Type="Surface Mount", Packaging=TapeAndReel, PartId=384, Part Number=ABS07-166-32.768KHZ-T, Part Status=Active, Price=0.35, Series=ABS07, Size / Dimension="0.126\" L x 0.059\" W (3.20mm x 1.50mm)", Supplier 1=DigiKey, Type="kHz Crystal (Tuning Fork)"
Y2: library part "TSX-3225 25.0000MF20P-C0", "CRYSTAL 25.0000MHZ 18PF SMD", ESR (Equivalent Series Resistance)="40 Ohms", Frequency Stability=±20ppm, Frequency Tolerance=±10ppm, Load Capacitance=18pF, Manufacturer=EPSON, Operating Mode=Fundamental, Operating Temperature="-20°C ~ 85°C", Package / Case="4-SMD, No Lead", Supplier Part Number 1=SER4212CT-ND, ComponentLink1Description=Datasheet, ComponentLink1URL=https://support.epson.biz/td/api/doc_check.php?dl=brief_TSX-3225&lang=en, ComponentLink2Description="DigiKey Link", ComponentLink2URL=http://digikey.com/product-detail/en/epson/TSX-3225-25.0000MF20P-C0/SER4212CT-ND/7430967, Frequency=25MHz, Height - Seated (Max)="0.024\" (0.60mm)", LastUpdated="9/2/2020 1:21:54 AM", Lifecycle Status=Active, Minimum Order=1, Mounting Type="Surface Mount", Packaging=TapeAndReel, PartId=447, Part Number="TSX-3225 25.0000MF20P-C0", Part Status=Active, Price=0.18, Series=TSX-3225, Size / Dimension="0.126\" L x 0.098\" W (3.20mm x 2.50mm)", Supplier 1=DigiKey, Type="MHz Crystal"

## Free pads (board coordinates)
  round 165.35 hole 125.98: 11(196.85,196.85) 11(196.85,3740.16) 11(3740.16,196.85) 11(3740.16,3740.16)

## Via types
v1: diameter 23.62, hole 11.81, Top Layer to Bottom Layer, 208 vias

## Nets (pads, with @x,y where several pads share a name; then routed paths per layer and width w, separated by ;. In a path a pad name is that pad's centre, name@x,y a point inside that pad or via, vN(x,y) a via of type N, cw(c..) or ccw(c..) an arc to the next point about the centre after c; other vN are vias at no path point)
+3.3: C6.2 C7.2 C8.2 C9.2 C14.2 C15.2 C16.2 C17.2 C18.2 C19.2 C34.2 C52.2 J6.1 R13.2 R14.2 R16.2 R19.2 R88.1 TP3.1 U1.6 U1.11 U1.19 U1.21 U1.22 U1.28 U1.50 U1.75 U1.100 U5.4 U13.5 U?.7 | length 3078.5
  Top Layer w8: v1(795,2155) 795,2157 819,2181 v1(819,2183) ; R19.2 822.96,2236.55 R16.2 759,2232.55 759,2200 776,2183 v1(819,2183) ; v1(828,2881) 872.41,2881 873,2881.59 ; TP3.1@922,2176 915,2183 v1(819,2183) ; U5.4 928.68,2459 960,2459 970,2469 970,2507.61 942.57,2535.03 C34.2 942,2537.57 v1(942,2579) ; C19.2 1592,1721 1610,1739 1610,1774 1626.61,1790.61 1663.64,1790.61 U1.22 ; C18.2 1596,1786 1621.02,1811.02 U1.21 ; C7.2 1561.97,1850.39 U1.19 ; C6.2@1563.57,2010 1565.7,2007.87 v1@1606.13,2007.87 ; C17.2 1564.87,2106.3 v1@1610.3,2106.3 ; v1(1606,2008) v1@1606.13,2007.87 ; v1(1610,2106) v1@1610.3,2106.3 ; U1.6@1663,2106 1662.7,2106.3 v1@1610.3,2106.3 ; U1.11 v1@1606.13,2007.87 ; v1(1732,2322) 1732,2321.57 v1@1732.28,2321.28 ; U1.100 v1@1732.28,2321.28 ; C15.2@1733,2358 1732.28,2357.28 v1@1732.28,2321.28 ; U13.5 1754,3112.02 1790.98,3149 v1@1822,3149 ; v1@1771.65,1600.35 U1.28 ; C8.2 1772.42,1556 v1(1772.42,1599.58) ; v1(1817,2610) 1817,2553.62 1839.03,2531.59 R14.2 ; v1@1820,2610 1895,2610 1917,2588 R13.2 ; v1@1822,3145 1824,3143 C52.2 ; U1.50 2204.72,1623.28 2224,1604 v1(2237,1604) 2238,1604 2251,1591 C9.2 ; U1.75 2308.72,2204.72 v1(2323,2219) 2336,2232 C14.2@2372.43,2232 ; C14.2 C14.2@2377.43,2240
  Top Layer w10: v1(1665,2321) C16.2
  Top Layer w12: v1(1561,1676) v1@1561.08,1676 ; C7.2 1561.08,1849.51 v1@1561.08,1676 ; R88.1@1562,1636 1561.08,1636.92 v1@1561.08,1676
  Bottom Layer w8: v1(828,2881) 898,2881 942,2837 942,2580 v1@941,2579 ; v1(1384,2473) 1521,2610 v1@1820,2610
  other v1: 1771,761 1824,3149
+5: C53.2 U13.3 | length 1122.2
  Top Layer w8: U13.3 1704,2924 1709,2929 1821.57,2929 C53.2 v1(1825,2967)
  Bottom Layer w8: 912,2967 v1(1825,2967)
+5_Supply: C3.2 C4.2 C29.2 C30.2 J1.5 J1.6 R17.2 U4.10 U4.11 U4.12 | length 8.5
  Top Layer w25: C3.2@1136,3456 C3.2@1141.87,3461.87 ; J1.6 J1.6@1141.87,3710.5
+12_Supply: C1.2 C2.2 J1.1 J1.2 | length 236.9
  Top Layer w50: C1.2@826,3634 829.47,3634 831.58,3631.89 J1.1 ; J1.1@984.03,3634.03 984.03,3710.4 J1.2 J1.2@984.48,3710.4 ; J1.1@984.48,3633.52 J1.1@985,3633
GND: C1.1 C2.1 C3.1 C4.1 C6.1 C7.1 C8.1 C9.1 C10.1 C11.1 C12.1 C13.1 C14.1 C15.1 C16.1 C17.1 C18.1 C19.1 C20.1 C21.1 C22.1 C26.1 C27.1 C28.1 C29.1 C30.1 C32.1 C34.1 C52.1 C53.1 D2.2 D4.3 J1.3 J1.4 J1.7 J1.8 J1.11 J1.12 J1.23 J1.24 J2.5 J2.S J6.2 J6.3 J6.5 R2.2 R3.2 R4.2 R5.2 R7.2 R8.2 R12.2 R30.1 R55.1 S1.1 S1.2 U1.10 U1.20 U1.27 U1.74 U1.99 U3.3 U4.5 U4.6 U4.7 U4.15 U4.16 U4.17@651.88,2633.45 U5.3 U5.7 U5.8 U13.2 U?.8 Y2.2 Y2.4 | length 155.9
  Top Layer w8: U3.3 967.84,301.27 967.84,270.16 v1(969,269) ; v1(1699,2456) 1700.91,2454.09 1700.91,2438.69 1728,2411.61 C15.1@1728,2408 ; v1(1837,2445.87) 1832.77,2445.87 1825.23,2438.32 1821.64,2438.32 1814.47,2431.15 1834.62,2411 R12.2@1839,2411